# EAGLE board Controller Board (EAGLE 8.2.0), part 1 of 2
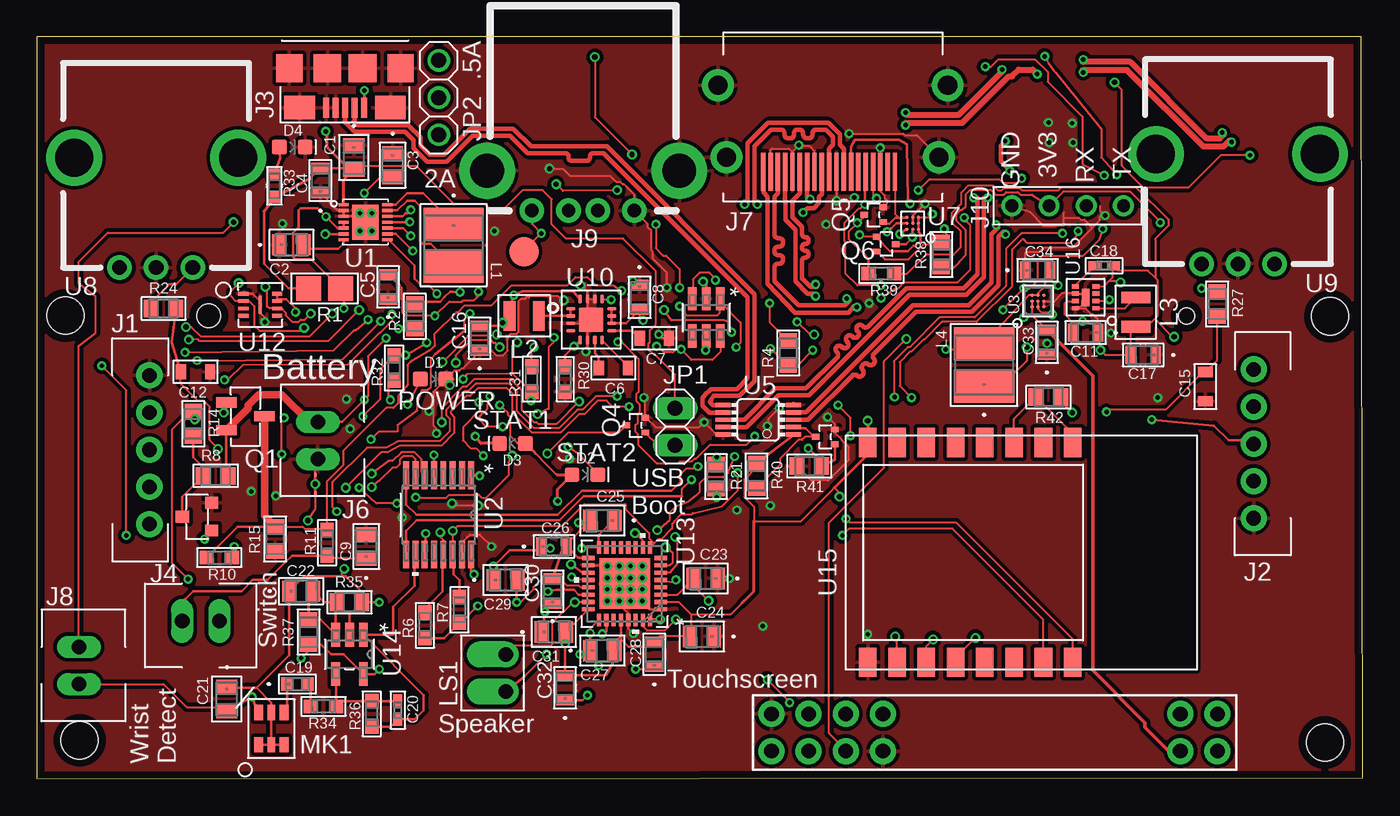
[diagram p0: board, top side]
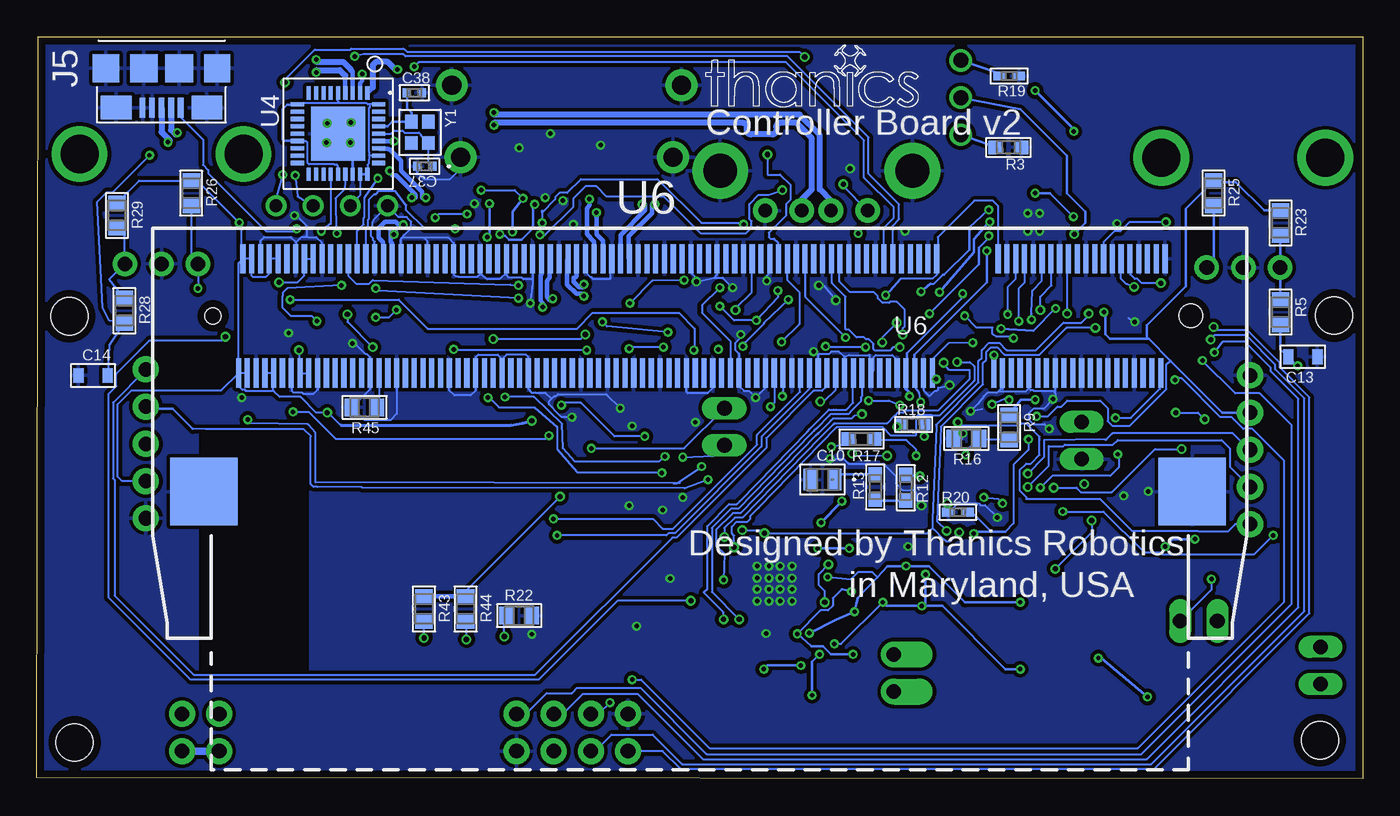
[diagram p1: board, bottom side, seen from below]

Size 90.62 x 50.7 mm. Coordinates in mm from the lower left corner, seen from the top.
Outline: 0,0 90.62,0.08 90.52,50.7 0,50.67 0,0
Copper layers (1*16): Top 0.035mm / dielectric 1.6mm / Bottom 0.035mm
Design rules "Elecrow_2-layer_PCB_eagle_rule *": minimum track width 6mil, minimum drill 12mil, track to track 6mil, track to pad 6mil, pad to pad 6mil, via to via 8mil, smd to smd 0mil, copper to edge 20mil, drill to drill 10mil, minimum pad ring 6mil, minimum via ring 6mil, stop-mask expansion 0mil, vias tented up to drill 100mil, thermal gap 10mil
Holes 2.54 mm at 88.03,2.49 2.94,2.64 88.38,31.6 1.97,31.65

## Footprints (pad centres in the part's own frame; a part is rotated, then mirrored left to right if it is on the bottom)
0805 = smd 0.965 x 1.448: 1 -0.826,0; 2 0.826,0
YAG_CC0805 = smd 0.965 x 1.448: 1 -0.826,0; 2 0.826,0
G-21 = smd 0.711 x 1.245: 1 -0.851,0; 2 0.851,0
0603_CAPACITOR = smd 0.701 x 1.001: 1 -1.001,0; 2 1.001,0
CC0402N-M = smd 0.864 x 0.61: 1 -0.635,0; 2 0.635,0
G-188-M = smd 0.813 x 0.914: 1 -0.699,0; 2 0.699,0
G-155-M = smd 0.559 x 0.61: 1 -0.521,0; 2 0.521,0
LED-0603 = smd 1 x 1: A -0.877,0; C 0.877,0
JST-XH_5POS = drill 1 pad 1.778: 1 0,5.08; 2 0,2.54; 3 0,0; 4 0,-2.54; 5 0,-5.08
USB_MICRO_B_SMT = smd 0.4 x 1.35: 1 -1.3,0; 2 -0.65,0; 3 0,0; 4 0.65,0; 5 1.3,0 | smd 1.9 x 1.9: 6 -1.2,-2.68; 7 1.2,-2.68 | smd 2.1 x 1.6: P$1 -3.1,0; P$2 3.1,0 | smd 1.8 x 1.9: P$3 3.8,-2.68; P$4 -3.8,-2.68
XH_CONNECTOR = drill 1.001 long: 1 -1.27,0; 2 1.27,0
HDMI = smd 0.3 x 2.6: 1 4.75,4; 2 4.25,4; 3 3.75,4; 4 3.25,4; 5 2.75,4; 6 2.25,4; 7 1.75,4; 8 1.25,4; 9 0.75,4; 10 0.25,4; 11 -0.25,4; 12 -0.75,4; 13 -1.25,4; 14 -1.75,4; 15 -2.25,4; 16 -2.75,4; 17 -3.25,4; 18 -3.75,4; 19 -4.25,4 | drill 1.3 pad 2.184: P$1 7.25,3; P$2 -7.25,3; P$3 -7.85,-1.9; P$4 7.85,-1.9
USB_A_RECEPT = drill 0.92 pad 1.676: 1 3.5,0; 2 1,0; 3 -1,0; 4 -3.5,0 | drill 2.3 pad 3.81: 5 -6.57,-2.71; 6 6.57,-2.71
4_PIN_TELE_CONNECTOR = drill 0.87 pad 1.422: 1 0,3.81; 2 0,1.27; 3 0,-1.27; 4 0,-3.81
1X02 = drill 1.016 long: 1 -1.27,0; 2 1.27,0
1X03 = drill 1.016: 1 -2.54,0; 2 0,0; 3 2.54,0
IND_IFSC_1515AH-M = smd 2.21 x 4.115: 1 -1.46,0; 2 1.46,0
470NH_INDUCTOR = smd 0.8 x 2: P$1 -1,0; P$2 1,0
SPEAKER = drill 0.991 pad 1.778 offset: 1 -1.27,0; 2 1.27,0
SISONIC_MICROPHONE = smd 1.032 x 0.622: 1 -1.104,0.884; 3 -1.104,-0.884; 4 1.104,-0.884; 6 1.104,0.884 | smd 1.032 x 0.5: 2 -1.104,0; 5 1.104,0
SC59_MOSFET = smd 0.7 x 1.4: D 0,1.3; G -0.95,-1.3; S 0.95,-1.3
SOT-23_(TO-236AB) = smd 0.8 x 0.9: D 0,-1; G 0.95,1; S -0.95,1
SOT-523 = smd 0.4 x 0.51: D 0,0.65; G -0.5,-0.65; S 0.5,-0.65
1206 = smd 1.727 x 1.676: 1 -1.092,0; 2 1.092,0
RC0805N = smd 1.006 x 1.2: 1 -0.853,0; 2 0.853,0
RC0603N-M = smd 0.965 x 0.914: 1 -0.876,0; 2 0.876,0
RC0603N = smd 0.762 x 0.813: 1 -0.775,0; 2 0.775,0
RC0402N-M = smd 0.864 x 0.61: 1 -0.66,0; 2 0.66,0
TP20R = smd 2 x 2: TP 0,0
AAT3620_TDFN = smd 0.7 x 0.22: 1 -1.5,1.2; 2 -1.5,0.8; 3 -1.5,0.4; 4 -1.5,0; 5 -1.5,-0.4; 6 -1.5,-0.8; 7 -1.5,-1.2; 8 1.5,-1.2; 9 1.5,-0.8; 10 1.5,-0.4; 11 1.5,0; 12 1.5,0.4; 13 1.5,0.8; 14 1.5,1.2 | smd 1.8 x 2.4: EP 0,0
21-0055H_16-M = smd 1.905 x 0.406: 1 -2.705,2.223; 2 -2.705,1.587; 3 -2.705,0.953; 4 -2.705,0.318; 5 -2.705,-0.318; 6 -2.705,-0.953; 7 -2.705,-1.587; 8 -2.705,-2.223; 9 2.705,-2.223; 10 2.705,-1.587; 11 2.705,-0.953; 12 2.705,-0.318; 13 2.705,0.318; 14 2.705,0.953; 15 2.705,1.587; 16 2.705,2.223
YFF9 = smd 0.23 x 0.23: A1 -0.4,0.4; A2 0,0.4; A3 0.4,0.4; B1 -0.4,0; B2 0,0; B3 0.4,0; C1 -0.4,-0.4; C2 0,-0.4; C3 0.4,-0.4
36-SQFN = smd 0.9 x 0.28: 1 -2.775,2; 2 -2.775,1.5; 3 -2.775,1; 4 -2.775,0.5; 5 -2.775,0; 6 -2.775,-0.5; 7 -2.775,-1; 8 -2.775,-1.5; 9 -2.775,-2; 19 2.775,-2; 20 2.775,-1.5; 21 2.775,-1; 22 2.775,-0.5; 23 2.775,0; 24 2.775,0.5; 25 2.775,1; 26 2.775,1.5; 27 2.775,2 | smd 0.28 x 0.9: 10 -2,-2.775; 11 -1.5,-2.775; 12 -1,-2.775; 13 -0.5,-2.775; 14 0,-2.775; 15 0.5,-2.775; 16 1,-2.775; 17 1.5,-2.775; 18 2,-2.775; 28 2,2.775; 29 1.5,2.775; 30 1,2.775; 31 0.5,2.775; 32 0,2.775; 33 -0.5,2.775; 34 -1,2.775; 35 -1.5,2.775; 36 -2,2.775 | smd 3.7 x 3.7: EP 0,0
MSOP10 = smd 0.3 x 1.02: 1 -1,-2.4; 2 -0.5,-2.4; 3 0,-2.4; 4 0.5,-2.4; 5 1,-2.4; 6 1,2.4; 7 0.5,2.4; 8 0,2.4; 9 -0.5,2.4; 10 -1,2.4
SO-DIMM = smd 0.35 x 2: 1 -26.4,-3.9; 2 -26.1,3.9; 3 -25.8,-3.9; 4 -25.5,3.9; 5 -25.2,-3.9; 6 -24.9,3.9; 7 -24.6,-3.9; 8 -24.3,3.9; 9 -24,-3.9; 10 -23.7,3.9; 11 -23.4,-3.9; 12 -23.1,3.9; 13 -22.8,-3.9; 14 -22.5,3.9; 15 -22.2,-3.9; 16 -21.9,3.9; 17 -21.6,-3.9; 18 -21.3,3.9; 19 -21,-3.9; 20 -20.7,3.9; 21 -20.4,-3.9; 22 -20.1,3.9; 23 -19.8,-3.9; 24 -19.5,3.9; 25 -19.2,-3.9; 26 -18.9,3.9; 27 -18.6,-3.9; 28 -18.3,3.9; 29 -18,-3.9; 30 -17.7,3.9; 31 -17.4,-3.9; 32 -17.1,3.9; 33 -16.8,-3.9; 34 -16.5,3.9; 35 -16.2,-3.9; 36 -15.9,3.9; 37 -15.6,-3.9; 38 -15.3,3.9; 39 -15,-3.9; 40 -14.7,3.9; 41 -10.8,-3.9; 42 -10.5,3.9; 43 -10.2,-3.9; 44 -9.9,3.9; 45 -9.6,-3.9; 46 -9.3,3.9; 47 -9,-3.9; 48 -8.7,3.9; 49 -8.4,-3.9; 50 -8.1,3.9; 51 -7.8,-3.9; 52 -7.5,3.9; 53 -7.2,-3.9; 54 -6.9,3.9; 55 -6.6,-3.9; 56 -6.3,3.9; 57 -6,-3.9; 58 -5.7,3.9; 59 -5.4,-3.9; 60 -5.1,3.9; 61 -4.8,-3.9; 62 -4.5,3.9; 63 -4.2,-3.9; 64 -3.9,3.9; 65 -3.6,-3.9; 66 -3.3,3.9; 67 -3,-3.9; 68 -2.7,3.9; 69 -2.4,-3.9; 70 -2.1,3.9; 71 -1.8,-3.9; 72 -1.5,3.9; 73 -1.2,-3.9; 74 -0.9,3.9; 75 -0.6,-3.9; 76 -0.3,3.9; 77 0,-3.9; 78 0.3,3.9; 79 0.6,-3.9; 80 0.9,3.9; 81 1.2,-3.9; 82 1.5,3.9; 83 1.8,-3.9; 84 2.1,3.9; 85 2.4,-3.9; 86 2.7,3.9; 87 3,-3.9; 88 3.3,3.9; 89 3.6,-3.9; 90 3.9,3.9; 91 4.2,-3.9; 92 4.5,3.9; 93 4.8,-3.9; 94 5.1,3.9; 95 5.4,-3.9; 96 5.7,3.9; 97 6,-3.9; 98 6.3,3.9; 99 6.6,-3.9; 100 6.9,3.9; 101 7.2,-3.9; 102 7.5,3.9; 103 7.8,-3.9; 104 8.1,3.9; 105 8.4,-3.9; 106 8.7,3.9; 107 9,-3.9; 108 9.3,3.9; 109 9.6,-3.9; 110 9.9,3.9; 111 10.2,-3.9; 112 10.5,3.9; 113 10.8,-3.9; 114 11.1,3.9; 115 11.4,-3.9; 116 11.7,3.9; 117 12,-3.9; 118 12.3,3.9; 119 12.6,-3.9; 120 12.9,3.9; 121 13.2,-3.9; 122 13.5,3.9; 123 13.8,-3.9; 124 14.1,3.9; 125 14.4,-3.9; 126 14.7,3.9; 127 15,-3.9; 128 15.3,3.9; 129 15.6,-3.9; 130 15.9,3.9; 131 16.2,-3.9; 132 16.5,3.9; 133 16.8,-3.9; 134 17.1,3.9; 135 17.4,-3.9; 136 17.7,3.9; 137 18,-3.9; 138 18.3,3.9; 139 18.6,-3.9; 140 18.9,3.9; 141 19.2,-3.9; 142 19.5,3.9; 143 19.8,-3.9; 144 20.1,3.9; 145 20.4,-3.9; 146 20.7,3.9; 147 21,-3.9; 148 21.3,3.9; 149 21.6,-3.9; 150 21.9,3.9; 151 22.2,-3.9; 152 22.5,3.9; 153 22.8,-3.9; 154 23.1,3.9; 155 23.4,-3.9; 156 23.7,3.9; 157 24,-3.9; 158 24.3,3.9; 159 24.6,-3.9; 160 24.9,3.9; 161 25.2,-3.9; 162 25.5,3.9; 163 25.8,-3.9; 164 26.1,3.9; 165 26.4,-3.9; 166 26.7,3.9; 167 27,-3.9; 168 27.3,3.9; 169 27.6,-3.9; 170 27.9,3.9; 171 28.2,-3.9; 172 28.5,3.9; 173 28.8,-3.9; 174 29.1,3.9; 175 29.4,-3.9; 176 29.7,3.9; 177 30,-3.9; 178 30.3,3.9; 179 30.6,-3.9; 180 30.9,3.9; 181 31.2,-3.9; 182 31.5,3.9; 183 31.8,-3.9; 184 32.1,3.9; 185 32.4,-3.9; 186 32.7,3.9; 187 33,-3.9; 188 33.3,3.9; 189 33.6,-3.9; 190 33.9,3.9; 191 34.2,-3.9; 192 34.5,3.9; 193 34.8,-3.9; 194 35.1,3.9; 195 35.4,-3.9; 196 35.7,3.9; 197 36,-3.9; 198 36.3,3.9; 199 36.6,-3.9; 200 36.9,3.9 | smd 4.6 x 4.6: G1 -28.254,12; G2 39.27,12 | hole 1.6: -28.15,0 | hole 1.1: 38.65,0
WLCSP9 = smd 0.23 x 0.23: A1 -0.4,0.4; A2 0,0.4; A3 0.4,0.4; B1 -0.4,0; B2 0,0; B3 0.4,0; C1 -0.4,-0.4; C2 0,-0.4; C3 0.4,-0.4
PEC12R = drill 2.6 pad 3.81: 1 -5.6,7.5; 2 5.6,7.5 | drill 1 pad 1.676: A -2.5,0; B 2.5,0; C 0,0
VQFN16 = smd 0.6 x 0.24: 1 -1.4,0.75; 2 -1.4,0.25; 3 -1.4,-0.25; 4 -1.4,-0.75; 9 1.4,-0.75; 10 1.4,-0.25; 11 1.4,0.25; 12 1.4,0.75 | smd 0.24 x 0.6: 5 -0.75,-1.4; 6 -0.25,-1.4; 7 0.25,-1.4; 8 0.75,-1.4; 13 0.75,1.4; 14 0.25,1.4; 15 -0.25,1.4; 16 -0.75,1.4 | smd 1.68 x 1.68: 17 0,0
MF06A-M = smd 1.575 x 0.584: 1 -1.27,0.953; 2 -1.27,0; 3 -1.27,-0.953; 4 1.27,-0.953; 5 1.27,0; 6 1.27,0.953
PG-USON-8-1 = smd 0.7 x 0.25: 1 -1.15,0.75; 2 -1.15,0.25; 3 -1.15,-0.25; 4 -1.15,-0.75; 5 1.15,-0.75; 6 1.15,-0.25; 7 1.15,0.25; 8 1.15,0.75 | smd 0.2 x 1.2: 9 0,0
RHB32_3P45X3P45 = smd 0.85 x 0.28: 1 -2.475,1.75; 2 -2.475,1.25; 3 -2.475,0.75; 4 -2.475,0.25; 5 -2.475,-0.25; 6 -2.475,-0.75; 7 -2.475,-1.25; 8 -2.475,-1.75; 17 2.475,-1.75; 18 2.475,-1.25; 19 2.475,-0.75; 20 2.475,-0.25; 21 2.475,0.25; 22 2.475,0.75; 23 2.475,1.25; 24 2.475,1.75 | smd 0.28 x 0.85: 9 -1.75,-2.475; 10 -1.25,-2.475; 11 -0.75,-2.475; 12 -0.25,-2.475; 13 0.25,-2.475; 14 0.75,-2.475; 15 1.25,-2.475; 16 1.75,-2.475; 25 1.75,2.475; 26 1.25,2.475; 27 0.75,2.475; 28 0.25,2.475; 29 -0.25,2.475; 30 -0.75,2.475; 31 -1.25,2.475; 32 -1.75,2.475 | smd 3.45 x 3.45: 33 0,0
SOT-23-5_MC-M = smd 1.626 x 0.61: 1 -1.346,0.95; 2 -1.346,0; 3 -1.346,-0.95; 4 1.346,-0.95; 5 1.346,0.95
ESP-12 = smd 2 x 1.2: 1 -7.5,4.5; 2 -7.5,2.5; 3 -7.5,0.5; 4 -7.5,-1.5; 5 -7.5,-3.5; 6 -7.5,-5.5; 7 -7.5,-7.5; 8 -7.5,-9.5; 9 7.5,-9.5; 10 7.5,-7.5; 11 7.5,-5.5; 12 7.5,-3.5; 13 7.5,-1.5; 14 7.5,0.5; 15 7.5,2.5; 16 7.5,4.5
MLF(ML)_8PIN = smd 0.5 x 0.3: 1 -0.7,0.75; 2 -0.7,0.25; 3 -0.7,-0.25; 4 -0.7,-0.75; 5 0.7,-0.75; 6 0.7,-0.25; 7 0.7,0.25; 8 0.7,0.75 | smd 0.5 x 1.2: EP 0,0
3.5_TOUCHSCREEN = drill 1 pad 1.778: 1 -12.7,1.27; 2 -10.16,1.27; 3 10.16,1.27; 4 12.7,1.27; 5 15.24,1.27; 6 17.78,1.27; 7 17.78,-1.27; 8 15.24,-1.27; 9 12.7,-1.27; 10 10.16,-1.27; 11 -10.16,-1.27; 12 -12.7,-1.27
AGND-DGND = smd 0.178 x 0.254: 1 0,0.635; 2 0,-0.635 | drill 0.356: 3 0,0
FA-128 = smd 0.95 x 0.85: 1 -0.725,-0.575; 2 0.725,-0.575; 3 0.725,0.575; 4 -0.725,0.575

## Placement (x,y rotation side)
C1  0.1uF  [0805]  21.68,42.44 270 top
C2  0.1uF  [0805]  17.41,36.47 0 top
C3  1uF  [YAG_CC0805]  24.32,41.91 270 top
C4  10uF  [G-21]  19.4,40.87 90 top
C5  22uF  [G-21]  24.02,33.6 90 top
C6  10nF  [0603_CAPACITOR]  39.41,28.07 180 top
C7  10nF  [0603_CAPACITOR]  42.2,30.1 180 top
C8  10uF  [G-21]  41.19,32.89 270 top
C9  1uF  [YAG_CC0805]  22.52,15.88 90 top
C10  0.1uF  [0805]  36.92,20.45 180 bottom
C11  10uF  [G-21]  71.67,30.48 180 top
C12  10nF  [0603_CAPACITOR]  10.86,27.81 180 top
C13  10nF  [0603_CAPACITOR]  4.1,28.83 180 bottom
C14  10nF  [0603_CAPACITOR]  86.76,27.56 0 bottom
C15  10nF  [0603_CAPACITOR]  79.85,26.8 90 top
C16  22uF  [G-21]  30.27,30.1 90 top
C17  10uF  [G-21]  75.61,28.96 180 top
C18  560pF  [CC0402N-M]  72.94,35.05 0 top
C19  2.2uF  [G-188-M]  17.82,6.48 0 top
C20  560pF  [CC0402N-M]  24.68,4.7 270 top
C21  0.1uF  [0805]  12.99,5.46 270 top
C22  1uF  [YAG_CC0805]  18.07,12.83 0 top
C23  0.1uF  [0805]  45.71,13.69 180 top
C24  0.1uF  [0805]  45.46,9.73 180 top
C25  0.1uF  [0805]  38.65,17.65 180 top
C26  10uF  [G-21]  35.35,15.88 0 top
C27  0.1uF  [0805]  38.65,8.76 0 top
C28  10uF  [G-21]  42.2,8.51 90 top
C29  0.1uF  [0805]  32.04,13.59 0 top
C30  22uF  [G-21]  35.25,12.83 90 top
C31  0.1uF  [0805]  35.35,10.03 0 top
C32  22uF  [G-21]  36.11,6.22 90 top
C33  10uF  [G-21]  69.03,29.82 90 top
C34  10uF  [G-21]  68.39,34.75 0 top
C37  16pF  [G-155-M]  64.1,41.83 180 bottom
C38  16pF  [G-155-M]  64.81,46.86 0 bottom
D1  GREEN  [LED-0603]  27.09,27.3 0 top
D2  GREEN  [LED-0603]  37.47,20.78 0 top
D3  RED  [LED-0603]  32.52,22.91 180 top
D4  GREEN  [LED-0603]  17.47,43.15 0 top
J1  JOYSTICK  [JST-XH_5POS]  7.71,22.48 0 top
J2  JOYSTICK  [JST-XH_5POS]  83.15,22.89 180 top
J3  USB_MICRO_B_SMT  [USB_MICRO_B_SMT]  21.07,45.85 180 top
J4  2_PIN_CONNECTOR  [XH_CONNECTOR]  11.22,10.79 180 top
J5  USB_MICRO_B_SMT  [USB_MICRO_B_SMT]  82.08,45.85 180 bottom
J6  POWER_CONNECTOR  [XH_CONNECTOR]  19.22,23.11 270 top
J7  HDMI  [HDMI]  54.4,45.47 180 top
J8  2_PIN_CONNECTOR  [XH_CONNECTOR]  2.89,7.75 270 top
J9  USB_A_RECEPT  [USB_A_RECEPT]  37.34,38.82 180 top
J10  4_PIN_TELE_CONNECTOR  [4_PIN_TELE_CONNECTOR]  70.45,39.14 270 top
JP1  [1X02]  43.63,24.05 270 top
JP2  [1X03]  27.47,46.53 90 top
L1  4.7uH  [IND_IFSC_1515AH-M]  28.49,36.45 270 top
L2  470nH  [470NH_INDUCTOR]  33.31,31.62 180 top
L3  470nH  [470NH_INDUCTOR]  75.1,31.88 270 top
L4  4.7uH  [IND_IFSC_1515AH-M]  64.73,28.27 90 top
LS1  [SPEAKER]  32.04,7.24 90 top
MK1  [SISONIC_MICROPHONE]  16.04,3.43 90 top
Q1  DMP3030SN_MOSFET  [SC59_MOSFET]  14.26,24.77 270 top
Q2  [SOT-23_(TO-236AB)]  10.96,17.91 270 top
Q3  [SOT-523]  53.89,23.37 90 top
Q4  [SOT-523]  40.93,24.16 90 top
Q5  [SOT-523]  57.19,38.53 90 top
Q6  [SOT-523]  58.05,36.53 270 top
R1  100  [1206]  19.67,33.5 180 top
R2  10k  [RC0805N]  25.85,31.6 90 top
R3  100k  [RC0603N-M]  24.22,43.13 180 bottom
R4  10k  [RC0805N]  51.35,29.08 90 top
R5  10k  [RC0805N]  5.63,31.88 270 bottom
R6  1k  [RC0603N-M]  26.53,10.49 90 top
R7  1k  [RC0603N-M]  28.9,11.56 90 top
R8  10k  [RC0805N]  12.23,20.7 0 top
R9  10k  [RC0805N]  24.17,24 270 bottom
R10  100k  [RC0603N-M]  12.49,15.11 180 top
R11  1M  [RC0603N-M]  19.85,16.13 90 top
R12  1k  [RC0603N-M]  31.23,19.89 270 bottom
R13  1k  [RC0603N-M]  33.31,19.94 90 bottom
R14  10k  [RC0805N]  10.71,24.26 270 top
R15  10k  [RC0805N]  16.3,16.38 90 top
R16  10k  [RC0805N]  27.09,23.24 180 bottom
R17  20R  [RC0603N-M]  34.25,23.22 180 bottom
R18  340R  [RC0603N]  30.7,24.21 0 bottom
R19  24.9k  [RC0402N-M]  24.17,48.01 180 bottom
R20  24.9k  [RC0402N-M]  27.68,18.21 0 bottom
R21  10k  [RC0805N]  46.42,20.65 270 top
R22  10k  [RC0805N]  57.65,11.15 0 bottom
R23  10k  [RC0805N]  5.63,37.97 270 bottom
R24  10k  [RC0805N]  8.68,32.13 0 top
R25  10k  [RC0805N]  10.2,40.01 270 bottom
R26  10k  [RC0805N]  80.05,40.01 270 bottom
R27  10k  [RC0805N]  80.66,32.44 270 top
R28  10k  [RC0805N]  84.62,31.98 270 bottom
R29  10k  [RC0805N]  85.13,38.48 270 bottom
R30  160k  [RC0603N-M]  36.11,27.3 270 top
R31  499k  [RC0603N-M]  33.82,27.3 90 top
R32  20R  [RC0603N-M]  24.42,28.07 90 top
R33  340R  [RC0603N]  16.25,40.51 270 top
R34  1k  [RC0603N-M]  19.6,4.95 180 top
R35  10k  [RC0805N]  21.38,12.06 0 top
R36  100k  [RC0603N-M]  22.9,4.45 90 top
R37  10k  [RC0805N]  18.58,10.03 90 top
R38  NF  [RC0805N]  61.81,35.81 90 top
R39  100k  [RC0603N-M]  57.72,34.52 180 top
R40  10k  [RC0805N]  49.19,20.7 270 top
R41  10k  [RC0805N]  52.8,21.36 180 top
R42  10k  [RC0805N]  69.13,26.09 180 top
R43  10k  [RC0805N]  64.15,11.61 270 bottom
R44  10k  [RC0805N]  61.31,11.61 270 bottom
R45  10k  [RC0805N]  68.21,25.37 180 bottom
TP1  TPSQTP20R  [TP20R]  33.31,36.02 0 top
U1  AAT3620_BATT_CHARGER  [AAT3620_TDFN]  22.47,38.02 0 top
U2  8 CH  [21-0055H_16-M]  27.47,18.03 270 top
U3  [YFF9]  68.42,32.64 90 top
U4  [36-SQFN]  70.02,44.07 270 bottom
U5  FSUSB42MSOP10  [MSOP10]  49.3,24.53 90 top
U6  COMPUTE_MODULE  [SO-DIMM]  39.92,31.62 180 bottom
U7  ESD5384  [WLCSP9]  59.86,37.95 180 top
U8  PEC12R  [PEC12R]  8.17,34.92 0 top
U9  PEC12R  [PEC12R]  82.08,35.18 0 top
U10  TPS6209  [VQFN16]  37.89,31.37 0 top
U11  LM3880MF-1AA/NOPBMF06A-M  [MF06A-M]  45.76,31.52 270 top
U12  APPLE_2.0C_COPROCESSOR  [PG-USON-8-1]  15.28,32.38 0 top
U13  [RHB32_3P45X3P45]  40.17,13.34 180 top
U14  [SOT-23-5_MC-M]  21.38,8.51 270 top
U15  [ESP-12]  66.28,15.47 270 top
U16  MIC23050  [MLF(ML)_8PIN]  71.67,32.89 180 top
U$12  3.5_TOUCHSCREEN  [3.5_TOUCHSCREEN]  67.99,3.17 180 top
U$25  AGND-DGND  [AGND-DGND]  19.04,20.14 180 top
Y1  24MHZ  [FA-128]  64.44,44.16 270 bottom

## Library data of the parts
C1 C2 C10 C21 C23-C25 C27 C29 C31 = 0.1uF X7R Ceramic Capacitor; COPYRIGHT: Copyright C 2015 Accelerated Designs. All rights reserved; MANUFACTURER_PART_NUMBER: 08055C104KAT2A; VENDOR: Vendor
C3 C9 C22 = 1uF X7R Ceramic Capacitor; COPYRIGHT: Copyright C 2015 Accelerated Designs. All rights reserved; MANUFACTURER_PART_NUMBER: CC0805KKX7R7BB105; VENDOR: Vendor
C4 C8 C11 C17 C26 C28 C33 C34 = 10uF X5R Ceramic Capacitor; COPYRIGHT: Copyright C 2015 Accelerated Designs. All rights reserved; MANUFACTURER_PART_NUMBER: GRM21BR60J106ME19L; VENDOR: Vendor
C5 C16 C30 C32 = 22uF X5R Ceramic Capacitor; COPYRIGHT: Copyright C 2015 Accelerated Designs. All rights reserved; MANUFACTURER_PART_NUMBER: GRM21BR60J226ME39L; VENDOR: Vendor
C6 C7 C12-C15 J1-J6 J8-J10 L2 L3 LS1 MK1 Q1-Q6 R1 U1 U4 U7-U10 U12 U16 U$12 U$25 Y1 = thanics_robotics
C18 C20 = 560pF-capacitor; MANUFACTURER_PART_NUMBER: CC0402KRX7R9BB561; VENDOR: Yageo
C19 = 2.2uF X5R Capacitor; COPYRIGHT: Copyright C 2015 Accelerated Designs. All rights reserved; MANUFACTURER_PART_NUMBER: GRM188R61C225KE15J; VENDOR: Vendor
C37 C38 = 16pF-capacitor; MANUFACTURER_PART_NUMBER: GRM1555C1H160JA01D; VENDOR: Murata
D1-D4 = SparkFun-LED; PROD_ID: DIO-00821
J7 U5 U6 = raspberrypi_cm
JP1 = pinhead
JP2 U15 = adafruit
L1 L4 = 4.7uH-inductor; MANUFACTURER_PART_NUMBER: IFSC1515AHER4R7M01; VENDOR: VISHAY
R2 R4 R5 R8 R9 R14-R16 R21-R29 R35 R37 R38 R40-R45 = 10k-resistor; CASE: 0805 2012 metric; COMPOSITION: Thin Film; COPYRIGHT: Copyright C 2015 Accelerated Designs. All rights reserved; DATASHEET: httpindustrial.panasonic.comwwwcgijvcr13pz.cgi?E+PZ+3+AOA0026+ERA6AEB103V+7+WW; DIGIKEYPARTNUMBER: P10KDATRND; HEIGHT: 0.024" 0.60mm; LEADSTYLE: Surface Mount SMD SMT; MANUFACTURER_PART_NUMBER: ERA6AEB103V; NUMBEROFTERMINATIONS: 2; PACKAGECASE: 0805 2012 Metric; PACKAGING: Tape &amp Reel TR; POWERWATTS: 0.125W 18W; QUANTITY_AVAILABLE: 225000; RESISTANCEINOHMS: 10.0K; RESISTANCEOHMS: 10K; SIZEDIMENSION: 0.079" L x 0.049" W 2.00mm x 1.25mm; TEMPERATURECOEFFICIENT: 25ppm°C; TOLERANCE: 0.1%; VENDOR: Panasonic; VOLTAGEWORKING: 100V
R3 R10 R36 R39 = 100k-resistor; MANUFACTURER_PART_NUMBER: RC0603JR07100KL; VENDOR: Yageo
R6 R7 R12 R13 R34 = 1k-resistor; CASE: 0603 1608 metric; COMPOSITION: Thick Film; COPYRIGHT: Copyright C 2015 Accelerated Designs. All rights reserved; DATASHEET: httpwww.yageo.comdocumentsrecentPYuRC0603_51_RoHS_L_4.pdf; DESCRIPTION: RES 1.0K OHM 110W 5% 0603 SMD; DIGIKEYPARTNUMBER: 3111.0KGRTRND; HEIGHT: 0.022" 0.55mm; LEADSTYLE: Surface Mount SMD SMT; MANUFACTURER_PART_NUMBER: RC0603JR071KL; NEWARKPARTNUMBER: 14M7231; NUMBEROFTERMINATIONS: 2; PACKAGECASE: 0603 1608 Metric; PACKAGING: Tape &amp Reel TR; POWERWATTS: 0.1W 110W; QUANTITY_AVAILABLE: 0; RESISTANCEINOHMS: 1.00K; RESISTANCEOHMS: 1K; SIZEDIMENSION: 0.063" L x 0.031" W 1.60mm x 0.80mm; TEMPERATURECOEFFICIENT: 100ppm°C; TOLERANCE: 5%; VENDOR: Yageo; VOLTAGEWORKING: 50V
R11 = 1M-resistor; MANUFACTURER_PART_NUMBER: RC0603JR071ML; VENDOR: Yageo
R17 R32 = 20-resistor; MANUFACTURER_PART_NUMBER: RC0603JR0720RL; VENDOR: Yageo
R18 R33 = 340-resistor; CASE: 0603 1608 metric; COMPOSITION: Thick Film; COPYRIGHT: Copyright C 2015 Accelerated Designs. All rights reserved; DATASHEET: httpwww.yageo.comdocumentsrecentPYuRC0603_51_RoHS_L_4.pdf; DIGIKEYPARTNUMBER: 311340HRTRND; HEIGHT: 0.022" 0.55mm; LEADSTYLE: Surface Mount SMD SMT; MANUFACTURER_PART_NUMBER: RC0603FR07340RL; NEWARKPARTNUMBER: 66R2325; NUMBEROFTERMINATIONS: 2; PACKAGECASE: 0603 1608 Metric; PACKAGING: Tape &amp Reel TR; POWERWATTS: 0.1W 110W; QUANTITY_AVAILABLE: 95000; RESISTANCEINOHMS: 340; RESISTANCEOHMS: 340; SIZEDIMENSION: 0.063" L x 0.031" W 1.60mm x 0.80mm; TEMPERATURECOEFFICIENT: 100ppm°C; TOLERANCE: 1%; VENDOR: Yageo; VOLTAGEWORKING: 50V
R19 R20 = 24.9k-resistor; MANUFACTURER_PART_NUMBER: RC0402FR0724K9L; VENDOR: Yageo
R30 = 160k-resistor; MANUFACTURER_PART_NUMBER: RC0603FR07160KL; VENDOR: Yageo
R31 = 499k-resistor; MANUFACTURER_PART_NUMBER: RC0603FR07499KL; VENDOR: Yageo
TP1 = testpad
U2 = 8ch ADC; COPYRIGHT: Copyright C 2015 Accelerated Designs. All rights reserved; DATAINTERFACE: I²C Serial; DATASHEET: httpdatasheets.maximic.comendsMAX11606MAX11611.pdf; DESCRIPTION: IC ADC SERIAL 10BIT 8CH 16QSOP; DIGIKEYPARTNUMBER: MAX11608EEE+ND; MANUFACTURER_PART_NUMBER: MAX11608EEE+; MOUNTINGTYPE: Surface Mount; NUMBEROFBITS: 10; NUMBEROFCONVERTERS: 1; NUMBEROFINPUTSANDTYPE: 8 SingleEnded Unipolar 8 SingleEnded Bipolar 4 Differential Unipolar 4 Differential Bipolar; OPERATINGTEMPERATURE: 40°C ~ 85°C; PACKAGECASE: 16SSOP 0.154" 3.90mm Width; PACKAGING: Tube; POWERDISSIPATIONMAX: 666.7mW; QUANTITY_AVAILABLE: 814; SAMPLINGRATEPERSECOND: 94.4k; SUPPLIERDEVICEPACKAGE: 16QSOP; VENDOR: Maxim Integrated Products; VOLTAGESUPPLYSOURCE: Single Supply
U3 = tps61256-5vreg; MANUFACTURER_PART_NUMBER: TPS61256YFFR; VENDOR: Texas Instruments
U11 = LM3880MF; MANUFACTURER_PART_NUMBER: lm3880mf1aaNOPB; VENDOR: National Semiconductor
U13 = TLV320DAC-amp; MANUFACTURER_PART_NUMBER: tlv320dac3120_rhb_32; VENDOR: Texas Instruments
U14 = mcp6001t-opamp; MANUFACTURER_PART_NUMBER: MCP6001TIOT; VENDOR: Microchip

## Nets
+1V8: C17.2 C18.2 C23.2 L3.P$2 R39.1 U6.183 U6.184 U6.185 U6.186 U13.3 U16.4
+3V3: C16.2 C21.2 C24.2 C25.2 C26.2 C27.2 C28.2 C29.2 C30.2 C31.2 C32.2 D2.A D3.A J1.2 J2.2 J8.2 J10.3 L2.P$2 MK1.6 R6.1 R7.1 R23.1 R25.1 R26.1 R29.1 R31.1 R32.2 R37.1 R38.1 R40.1 R42.1 R43.1 R44.1 U2.16 U4.5 U4.10 U4.15 U4.23 U4.26 U4.27 U4.29 U4.36 U5.1 U6.39 U6.40 U6.41 U6.42 U6.191 U6.192 U6.193 U6.194 U6.197 U6.198 U6.199 U6.200 U10.16 U12.7 U12.8 U13.2 U13.17 U13.21 U13.24 U13.28 U14.5 U15.8
+5V: C33.2 J5.1 J9.1 Q6.G TP1.TP U3.A1 U3.A2 U7.A1 U7.B1 U7.C1 U$12.1 U$12.2
AGND: C21.1 C22.1 C25.1 C26.1 C27.1 C28.1 C29.1 C30.1 C31.1 C32.1 MK1.1 MK1.2 MK1.3 MK1.5 R35.2 U13.16 U13.20 U13.25 U14.2 U$25.1
D1_N: J3.2 U5.6
D1_P: J3.3 U5.7
D2_N: U4.30 U5.8
D2_P: U4.31 U5.9
DS1_N: J9.2 U4.1
DS1_P: J9.3 U4.2
DS2_N: J5.2 U4.3
DS2_P: J5.3 U4.4
EMMC_DISABLE_N: Q4.D U6.2
EMMC_EN_N_1V8: U6.90
ENCODER1_A: C13.2 R5.2 U6.76
ENCODER1_B: C12.2 R24.2 U6.78
ENCODER2_A: C15.2 R27.2 U6.75
ENCODER2_B: C14.2 R28.2 U6.77
GND: C1.1 C2.1 C3.1 C4.1 C5.1 C7.1 C8.1 C9.2 C10.2 C11.1 C12.1 C13.1 C14.1 C15.1 C16.1 C17.1 C23.1 C24.1 C33.1 C34.1 C37.2 C38.2 D1.C D4.C J1.1 J2.1 J3.4 J3.5 J3.6 J3.7 J3.P$1 J3.P$2 J3.P$3 J3.P$4 J5.4 J5.5 J5.6 J5.7 J5.P$1 J5.P$2 J5.P$3 J5.P$4 J6.2 J7.2 J7.5 J7.8 J7.11 J7.17 J7.P$1 J7.P$2 J7.P$3 J7.P$4 J9.4 J9.5 J9.6 J10.4 Q2.S Q3.S Q4.S Q5.S R3.1 R15.1 R16.2 R19.1 R20.1 R21.2 R22.2 R30.2 R41.2 R45.2 U1.2 U1.3 U1.EP U2.15 U3.C1 U3.C2 U4.25 U4.EP U5.5 U5.10 U6.1 U6.7 U6.8 U6.13 U6.14 U6.19 U6.20 U6.25 U6.26 U6.31 U6.32 U6.37 U6.38 U6.43 U6.44 U6.49 U6.50 U6.55 U6.56 U6.61 U6.62 U6.67 U6.68 U6.73 U6.74 U6.79 U6.80 U6.85 U6.86 U6.91 U6.92 U6.97 U6.98 U6.103 U6.104 U6.109 U6.110 U6.115 U6.116 U6.121 U6.122 U6.127 U6.133 U6.134 U6.139 U6.140 U6.145 U6.146 U6.151 U6.152 U6.157 U6.163 U6.164 U6.169 U6.170 U6.181 U6.182 U6.187 U6.188 U6.195 U6.196 U6.G1 U6.G2 U7.B2 U7.C2 U8.C U9.C U10.3 U10.6 U10.14 U10.15 U10.17 U11.2 U12.1 U12.9 U13.1 U13.18 U13.29 U13.33 U15.9 U16.6 U16.8 U16.EP U$12.3 U$12.7 U$25.2
GPIO18: U6.63 U13.7
GPIO19: U6.65 U13.6
GPIO21: U6.71 U13.5
GPIO25: U6.83 U$12.4
GPIO36: U6.58 U13.32
GPIO37: U6.60 U13.31
HDMI_CEC: Q6.S R38.2 U6.171
HDMI_CK_N: J7.12 U6.111
HDMI_CK_P: J7.10 U6.113
HDMI_D0_N: J7.9 U6.117
HDMI_D0_P: J7.7 U6.119
HDMI_D1_N: J7.6 U6.123
HDMI_D1_P: J7.4 U6.125
HDMI_D2_N: J7.3 U6.129
HDMI_D2_P: J7.1 U6.131
HDMI_HPD_N_1V8: Q5.D R39.2 U6.88
HDMI_SCL: J7.15 U6.175 U7.A3
HDMI_SDA: J7.16 U6.173 U7.B3
HEADPHONE_OUT: U13.27
I2C_SCL: R6.2 U2.13 U4.24 U6.11 U12.6 U13.10
I2C_SDA: R7.2 U2.14 U4.22 U6.9 U12.2 U13.9
ISET: JP2.2 U1.6
ITERM: R20.2 U1.10 U2.11
J1_SW: J1.5 U6.64
J2_SW: J2.5 U6.66
MIC_OUTPUT: C20.2 R36.1 U2.10 U14.1
N$1: J4.1 Q1.G R14.1
N$2: C2.2 U1.7
N$3: JP1.2 Q4.G R21.1
N$4: L1.2 U1.13
N$5: L1.1 U1.14
N$6: C3.2 R1.1 R2.1 U1.4 U1.5
N$7: C5.2 J6.1 Q1.S R8.2 R9.1 U1.12
N$8: U10.13 U11.6
N$9: D4.A R33.1
N$10: D1.A R32.1
N$11: R2.2 U1.11
N$12: U11.5 U16.2
N$13: C6.2 U10.7
N$14: C19.1 MK1.4
N$15: D2.C R17.2
N$16: R12.1 U2.1
N$17: J1.3 U2.6
N$18: J1.4 U2.7
N$19: J2.3 U2.8
N$20: J2.4 U2.9
N$21: C19.2 R34.2
N$22: D3.C R18.2
N$23: C6.1 U10.8
N$24: R12.2 R13.1
N$25: Q2.G R10.1
N$26: C9.1 J4.2 R11.1
N$27: Q2.D R8.1 R14.2
N$28: C10.1 R13.2
N$29: C7.2 U10.9
N$30: L2.P$1 U10.1 U10.2
N$31: R5.1 R23.2 U8.A
N$32: L3.P$1 U16.1
N$33: R42.2 U15.1 U15.3
N$34: R24.1 R25.2 U8.B
N$35: C20.1 R34.1 R36.2 U14.4
N$36: C22.2 R35.1 R37.2 U14.3
N$37: R26.2 R27.1 U9.A
N$38: R28.1 R29.2 U9.B
N$39: R9.2 R16.1 U2.5
N$40: JP2.1 R3.2
N$41: LS1.1 U13.22 U13.26
N$42: JP2.3 R19.2
N$43: R22.1 U15.10
N$44: LS1.2 U13.19 U13.23
N$45: R43.2 U15.12
N$46: R30.1 R31.2 U10.5
N$47: C8.2 C11.2 C34.2 L4.2 Q1.D R4.1 R10.2 R11.2 R15.2 U3.A3 U3.B3 U10.10 U10.11 U10.12 U11.1 U16.7
N$48: C18.1 U16.5
N$49: J7.13 Q6.D U7.A2
N$50: J7.19 Q5.G U7.C3
N$51: R44.2 U15.11
N$52: C38.1 U4.33 Y1.1
N$53: R45.1 U6.168
N$54: J8.1 U6.15
N$59: Q3.D R40.2 U5.2
N$60: C37.1 U4.32 Y1.3
N$61: L4.1 U3.B1 U3.B2
POWER_SEQ_EN: R4.2 U11.3
SPI_CS0: U6.27 U$12.5
SPI_CS1: U6.23 U$12.6
SPI_MISO: U6.29 U$12.9
SPI_MOSI: U6.33 U$12.10
SPI_SCLK: U6.35 U$12.8
STAT1: R17.1 U1.9 U6.46
STAT2: R18.1 U1.8 U6.48
UART2_RX: U6.72 U15.16
UART2_TX: U6.70 U15.15
UART_RX: J10.2 U6.53
UART_TX: J10.1 U6.51
USB_5V: C1.2 C4.2 J3.1 JP1.1 Q3.G R1.2 R33.2 R41.1 U1.1
USB_D_N: U5.4 U6.167
USB_D_P: U5.3 U6.165